# Altium PCB MicrophoneArray.PcbDoc
Units mil, origin at the board's own origin, x right, y up, seen from the top; angles counter-clockwise.
Board outline 2000 x 2000 mil, 2 copper layers (Top Layer, Bottom Layer); 64 components, 44 nets, 289 pads, 89 vias.
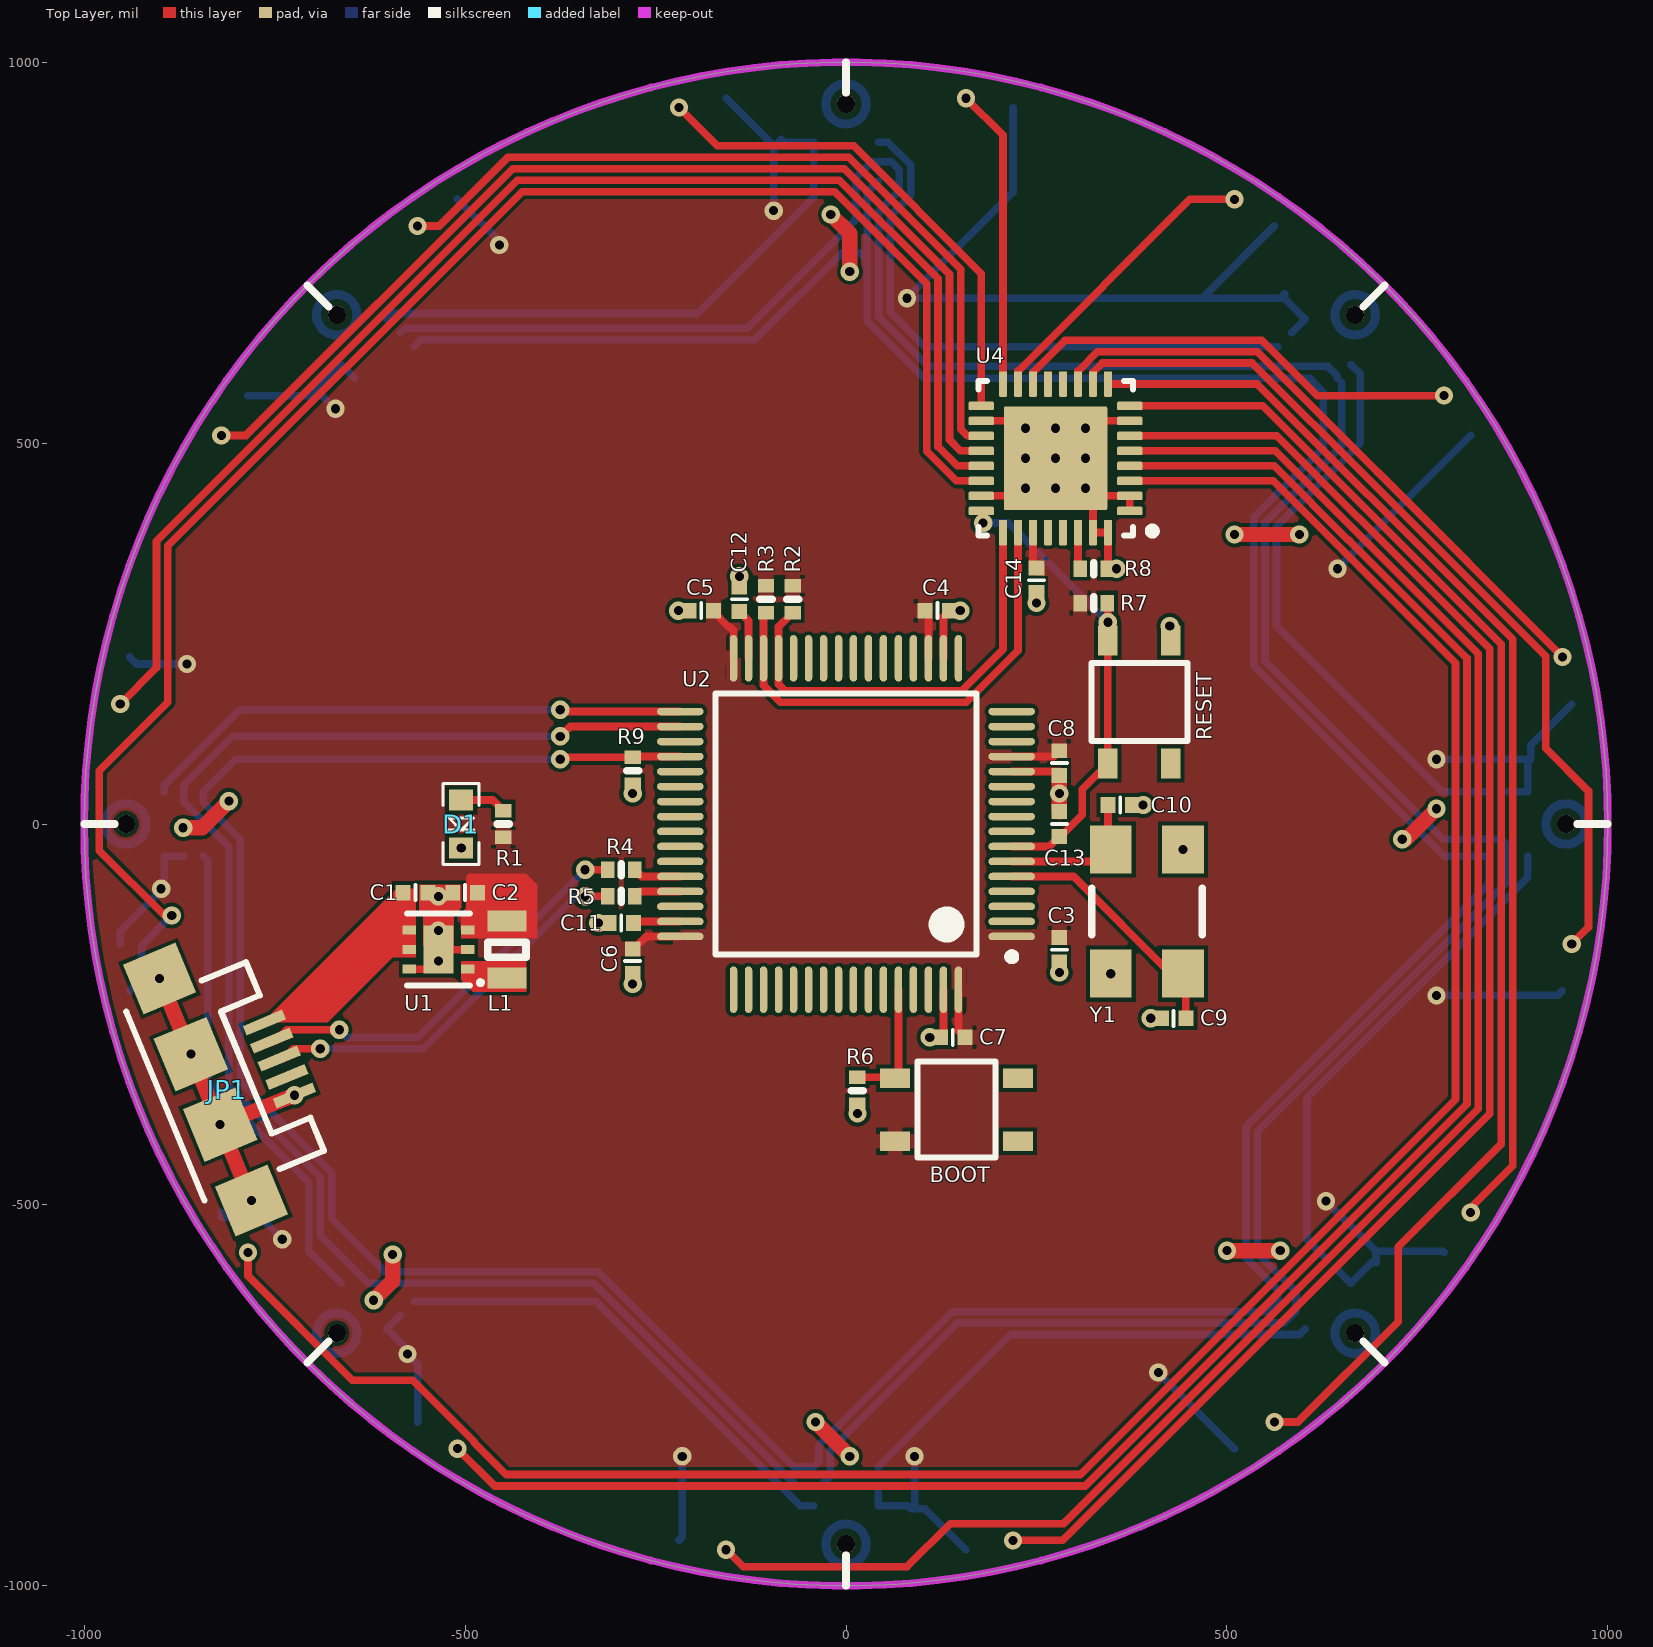
[diagram p0: Top Layer view]
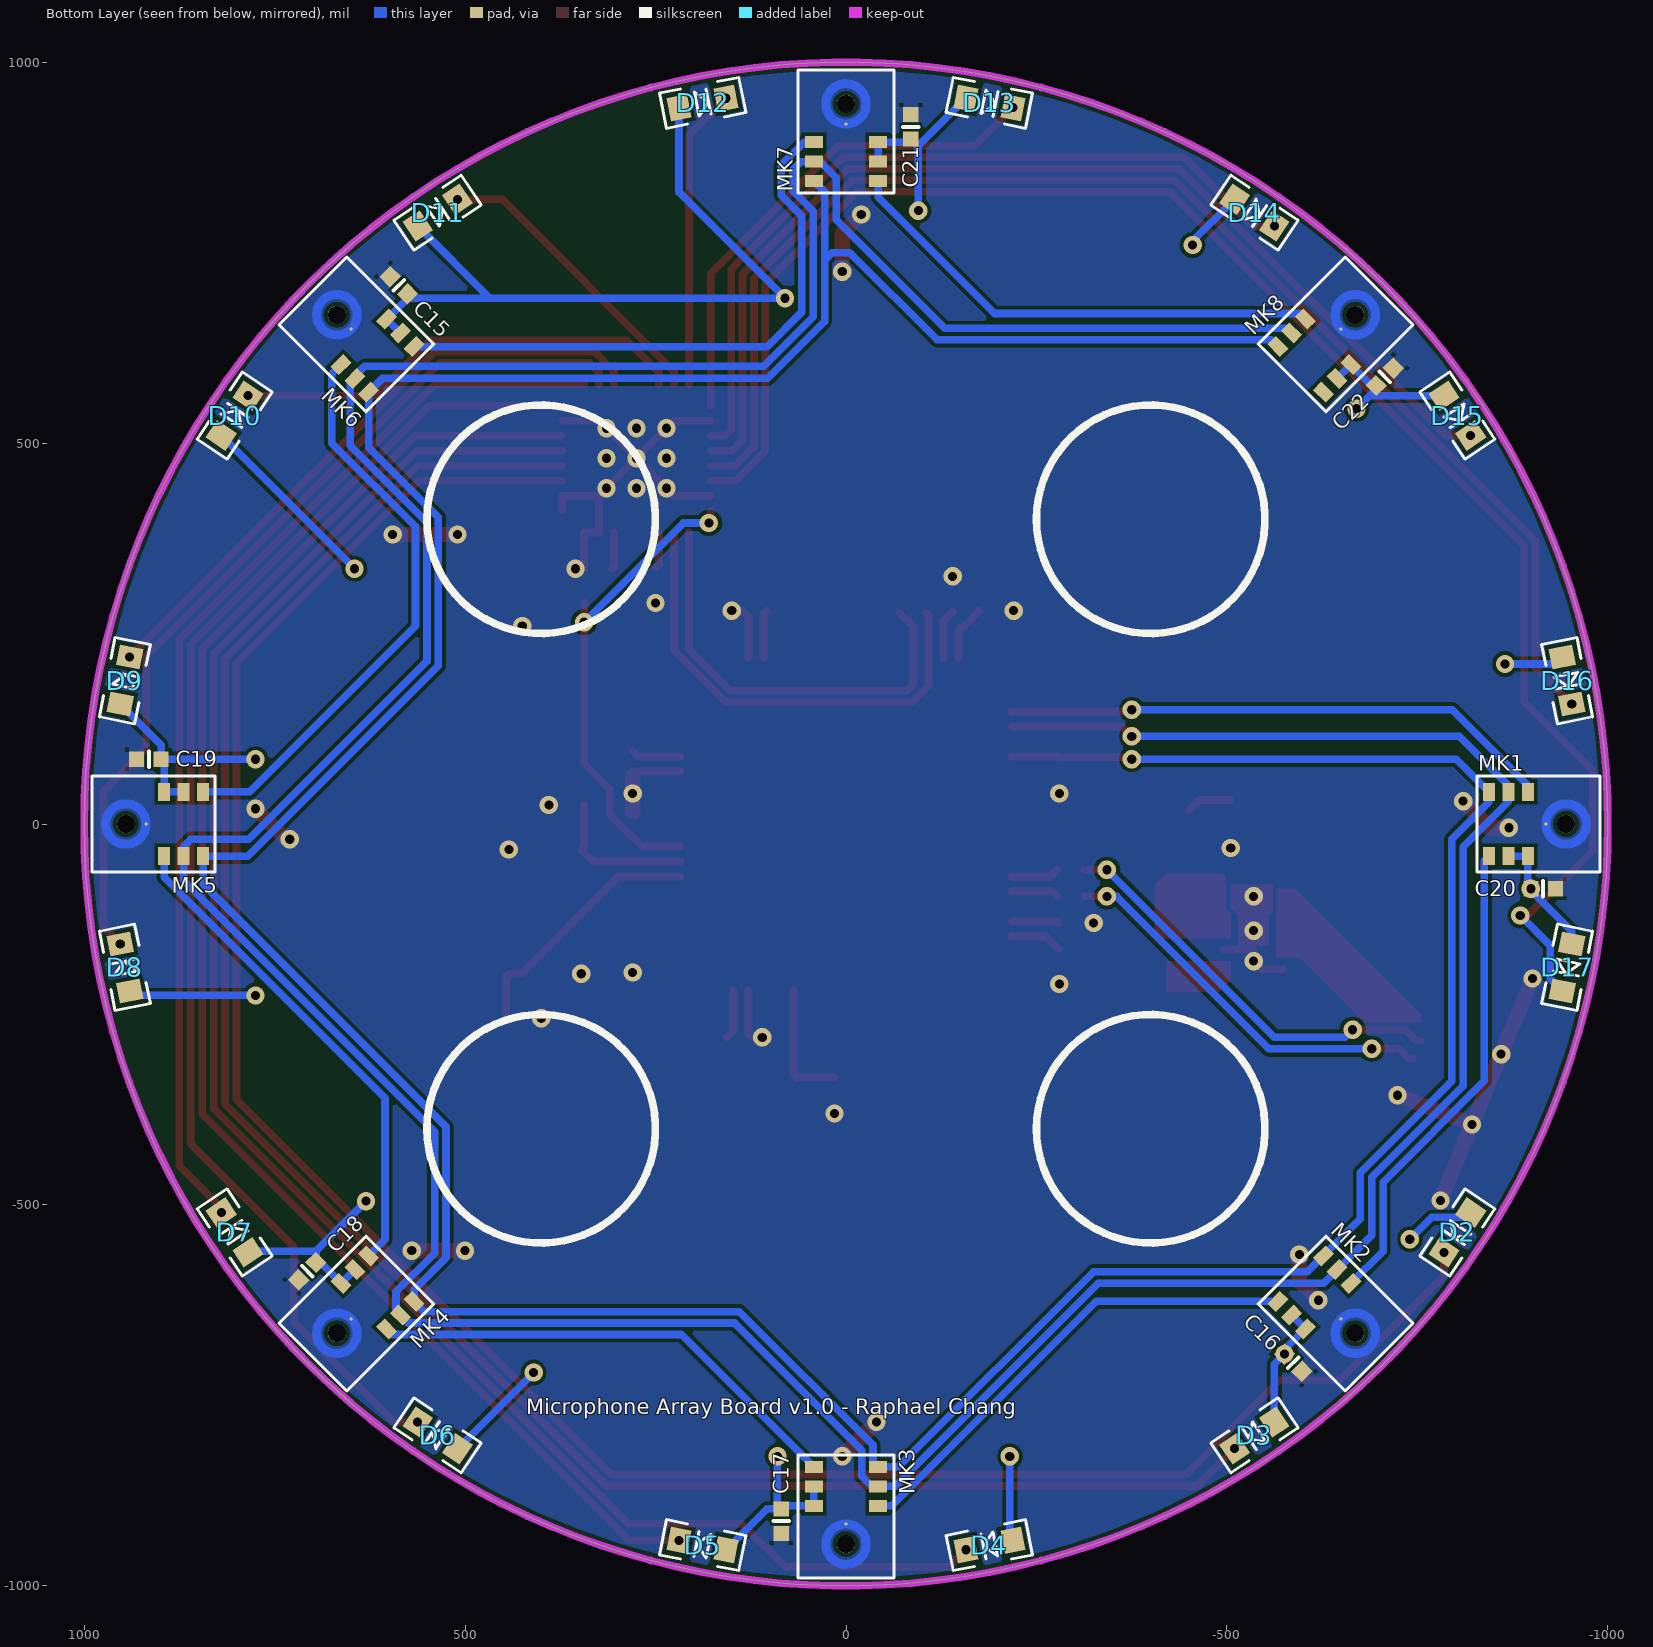
[diagram p1: Bottom Layer view, seen from below]
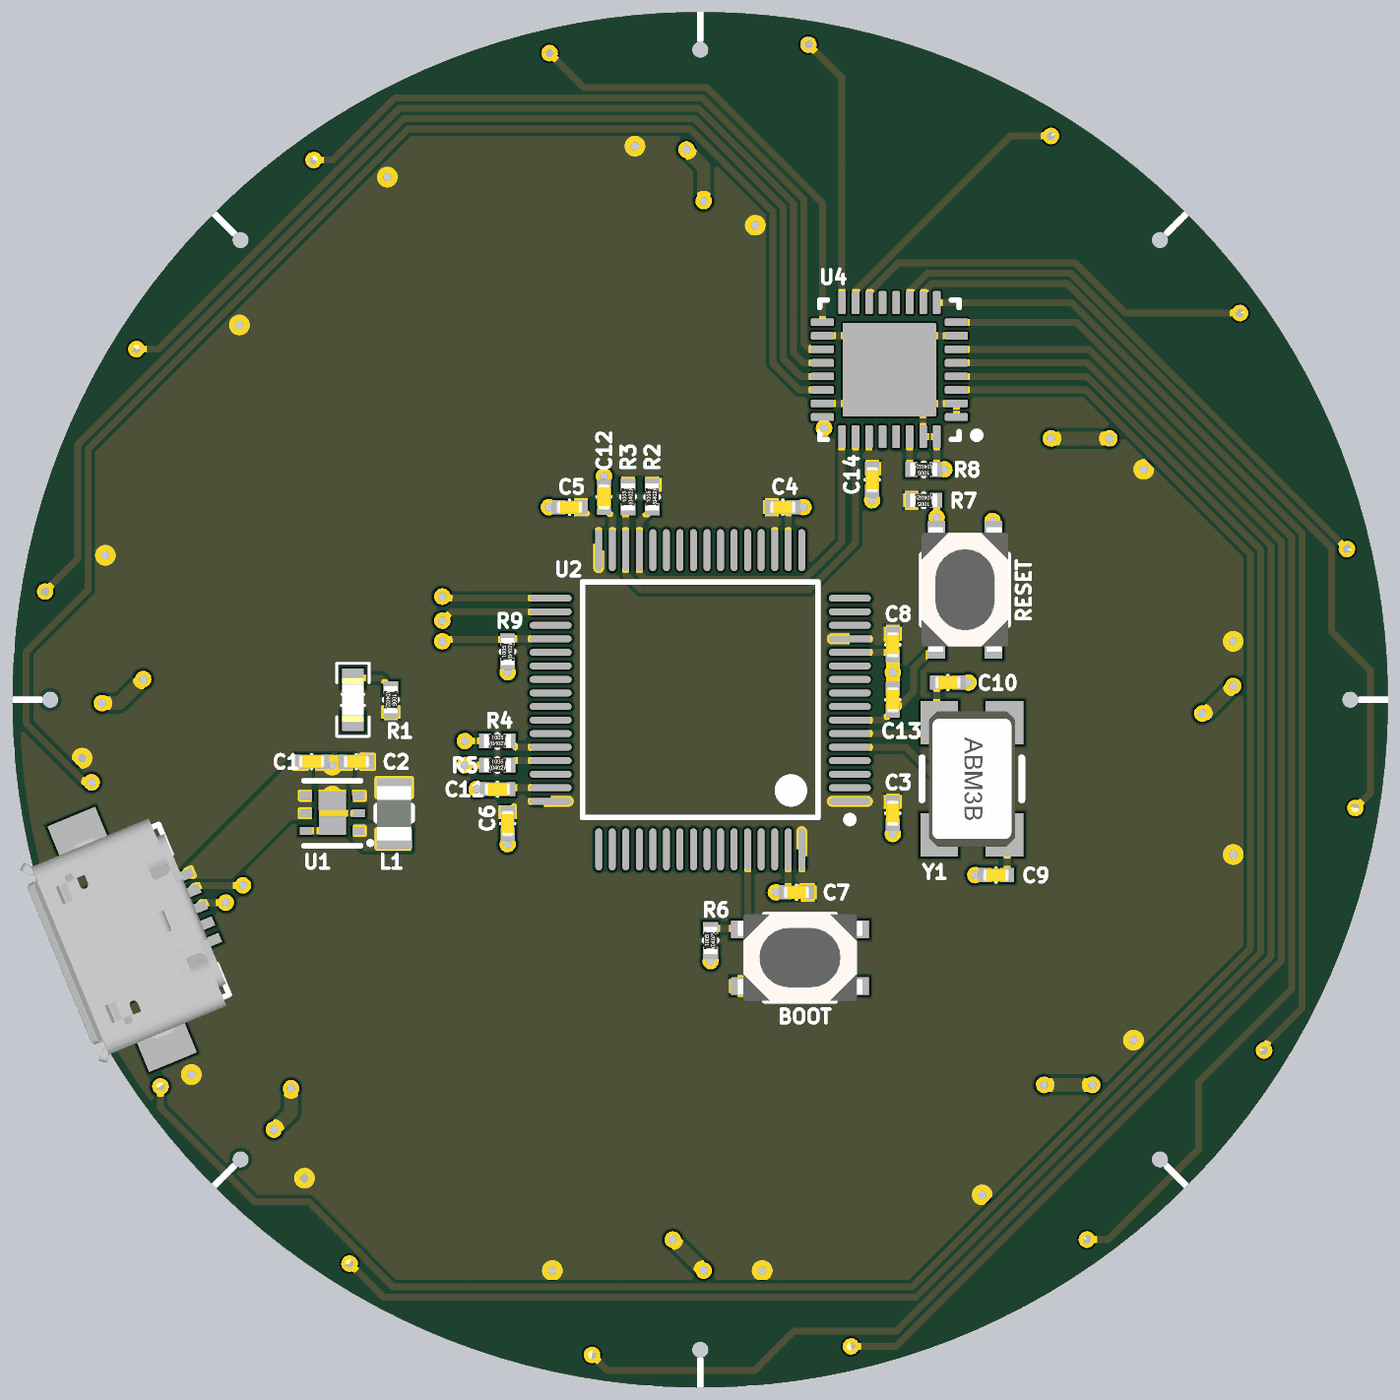
[diagram p2: 3D render of the assembled board from above, using the file's embedded part models]
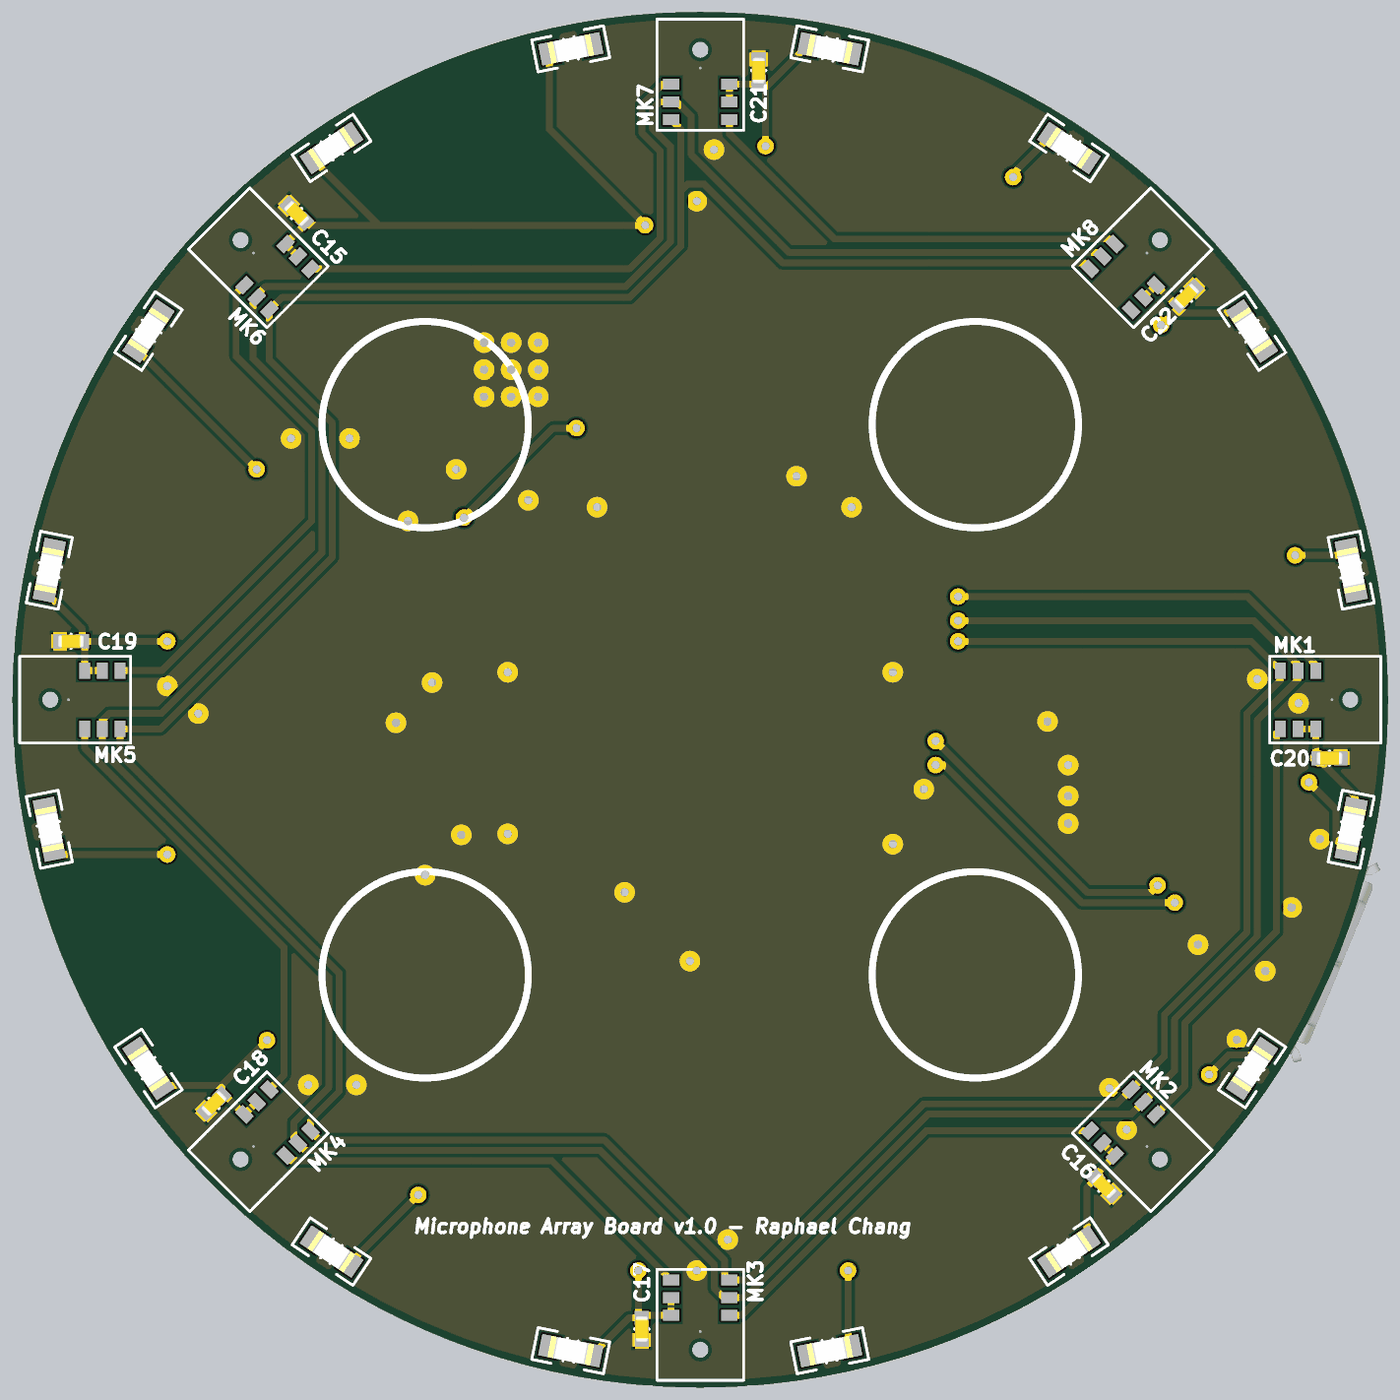
[diagram p3: 3D render of the assembled board from below, using the file's embedded part models]

## Layer stack, top to bottom
Top Solder: solder mask 0.4, Solder Resist, Dk 3.5
Top Layer: signal copper 1.4
Dielectric 1: dielectric 12.6, FR-4, Dk 4.8
Bottom Layer: signal copper 1.4
Bottom Solder: solder mask 0.4, Solder Resist, Dk 3.5

## Board outline
-1000,0 ccw(c0,0) 0,-1000 ccw(c0,0) 1000,0 ccw(c0,0) 0,1000 ccw(c0,0)

## Design rules (kind name [scope] priority, off if disabled: settings)
Clearance [All] p1: gap=5
PolygonConnect PolygonConnect_Via [IsVia] p1: connectstyle=Direct reliefconductorwidth=10 reliefentries=4 polygonreliefangle="90 Angle" airgapwidth=10
PolygonConnect [All] p2: connectstyle=Relief reliefconductorwidth=20 reliefentries=4 polygonreliefangle="90 Angle" airgapwidth=5
RoutingVias [All] p1: holewidth=12 width=24 viastyle="Through Hole" minholewidth=12 minwidth=24 maxholewidth=12 maxwidth=24
SolderMaskExpansion SolderMaskExpansion_Via [IsVia] p1: expansion=1 soldermaskfromhole=TRUE
SolderMaskExpansion [All] p2: expansion=3 soldermaskfromhole=TRUE
Width [All] p1: maxlimit=20 minlimit=8 preferedwidth=10
30 further rules are at their usual default settings.

## Components (designator, comment, footprint, x,y, rotation, side; value= is the part's Value field where it differs from the comment)
BOOT "" SWITCH 145,-375 r0 top (schematic designator BOOT1)
C1 "10uF 6.3V 0402" C0402[1005X55] -565,-90 r180 top
C2 "10uF 6.3V 0402" C0402[1005X55] -500,-90 r0 top
C3 "2.2uF 6.3V 0402" C0402[1005X55] 280,-165 r90 top
C4 "2.2uF 6.3V 0402" C0402[1005X55] 120,280 r180 top
C5 "2.2uF 6.3V 0402" C0402[1005X55] -190,280 r0 top
C6 "2.2uF 6.3V 0402" C0402[1005X55] -280,-180 r90 top
C7 "2.2uF 6.3V 0402" C0402[1005X55] 140,-280 r0 top
C8 "4.7uF 6.3V 0402" C0402[1005X55] 280,80 r90 top
C9 "15pF 50V 0402" C0402[1005X55] 430,-255 r180 top
C10 "15pF 50V 0402" C0402[1005X55] 360,25 r0 top
C11 "2.2uF 6.3V 0402" C0402[1005X55] -295,-130 r0 top
C12 "2.2uF 6.3V 0402" C0402[1005X55] -140,295 r270 top
C13 "0.1uF 6.3V 0402" C0402[1005X55] 280,0 r270 top
C14 "0.1uF 6.3V 0402" C0402[1005X55] 250,320 r90 top
C15 "0.1uF 6.3V 0402" C0402[1005X55] 586.9,707.11 r45 bottom
C16 "0.1uF 6.3V 0402" C0402[1005X55] -586.9,-707.11 r225 bottom
C17 "0.1uF 6.3V 0402" C0402[1005X55] 85,-915 r270 bottom
C18 "0.1uF 6.3V 0402" C0402[1005X55] 707.11,-586.9 r315 bottom
C19 "0.1uF 6.3V 0402" C0402[1005X55] 915,85 r0 bottom
C20 "0.1uF 6.3V 0402" C0402[1005X55] -915,-85 r180 bottom
C21 "0.1uF 6.3V 0402" C0402[1005X55] -85,915 r90 bottom
C22 "0.1uF 6.3V 0402" C0402[1005X55] -707.11,586.9 r135 bottom
D1 "LED_0603_GREEN_5mA" LED0603 -505,0 r270 top
D2 "LED_0603_BLUE_5mA" LED0603 -802.37,-536.13 r303.75 bottom
D3 "LED_0603_BLUE_5mA" LED0603 -536.13,-802.37 r326.25 bottom
D4 "LED_0603_BLUE_5mA" LED0603 -188.26,-946.46 r348.75 bottom
D5 "LED_0603_BLUE_5mA" LED0603 188.26,-946.46 r11.25 bottom
D6 "LED_0603_BLUE_5mA" LED0603 536.13,-802.37 r33.75 bottom
D7 "LED_0603_BLUE_5mA" LED0603 802.37,-536.13 r56.25 bottom
D8 "LED_0603_BLUE_5mA" LED0603 946.46,-188.26 r78.75 bottom
D9 "LED_0603_BLUE_5mA" LED0603 946.46,188.26 r101.25 bottom
D10 "LED_0603_BLUE_5mA" LED0603 802.37,536.13 r123.75 bottom
D11 "LED_0603_BLUE_5mA" LED0603 536.13,802.37 r146.25 bottom
D12 "LED_0603_BLUE_5mA" LED0603 188.26,946.46 r168.75 bottom
D13 "LED_0603_BLUE_5mA" LED0603 -188.26,946.46 r191.25 bottom
D14 "LED_0603_BLUE_5mA" LED0603 -536.13,802.37 r213.75 bottom
D15 "LED_0603_BLUE_5mA" LED0603 -802.37,536.13 r236.25 bottom
D16 "LED_0603_BLUE_5mA" LED0603 -946.46,188.26 r258.75 bottom
D17 "LED_0603_BLUE_5mA" LED0603 -946.46,-188.26 r281.25 bottom
JP1 "USB" USB-MICROB -840.73,-348.24 r292.5 top
L1 "2.2uH" IND0805 -445,-165 r90 top
MK1 "ICS-52000" MIC -895,0 r180 bottom
MK2 "ICS-52000" MIC -632.86,-632.86 r225 bottom
MK3 "ICS-52000" MIC 0,-895 r270 bottom
MK4 "ICS-52000" MIC 632.86,-632.86 r315 bottom
MK5 "ICS-52000" MIC 895,0 r0 bottom
MK6 "ICS-52000" MIC 632.86,632.86 r45 bottom
MK7 "ICS-52000" MIC 0,895 r90 bottom
MK8 "ICS-52000" MIC -632.86,632.86 r135 bottom
R1 "150R 1% 0402" R0402[1005] -450,0 r270 top
R2 "2K2 1% 0402" R0402[1005] -70,295 r90 top
R3 "2K2 1% 0402" R0402[1005] -105,295 r90 top
R4 "22R 1% 0402" R0402[1005] -295,-60 r0 top
R5 "22R 1% 0402" R0402[1005] -295,-95 r0 top
R6 "10K 1% 0402" R0402[1005] 15,-350 r90 top
R7 "10K 1% 0402" R0402[1005] 325,290 r180 top
R8 "1K5 1% 0402" R0402[1005] 325,335 r180 top
R9 "100K 1% 0402" R0402[1005] -280,70 r90 top
RESET "" SWITCH 385,160 r90 top (schematic designator RESET1)
U1 "TPS62291DRVR" WSON-6 -535,-165 r180 top
U2 "STM32F405RGT6" STM-LQFP64_L 0,0 r180 top
U4 "TLC59116IRHBR" RHB0032E_V 275,480 r180 top
Y1 "" ABRA-ABM3B-4_V 395,-115 r270 top

## Footprints (in the part's own frame and the unit in brackets; to place one, negate y for a bottom-side part, rotate by r counter-clockwise, add the part's x,y. Pads: shape width x height; smd on the part's side, far side on the other; paste and mask are expansions set on the pad)
ABRA-ABM3B-4_V [mil] "SMT Crystal, 4-Leads, Body 5.2x3.4mm"
  rect 63x55 smd: 1(-81.5,-47.5) 2(-81.5,47.5) 2(81.5,-47.5) 3(81.5,47.5)
  silkscreen extent -31,-72 31,72, body extent -98,-62 98,63, height 43
C0402[1005X55] [mm] "Chip Capacitor, Body 1.0x0.5mm"
  rect 0.5x0.52 smd: 1(-0.41,0) 2(0.41,0)
  silkscreen extent 0,-0.25 0,0.25, body extent -0.5,-0.25 0.5,0.25, height 0.56
IND0805 [mm] "Chip Inductor Body 2.0x1.25mm"
  rect 0.7x1.3 smd: 1(-0.95,0) 2(0.95,0)
  silkscreen extent -0.25,-0.64 0.25,0.64, body extent -1,-0.63 1,0.63, height 0.85
LED0603 [mm]
  rect 0.7x0.8 smd: A(-0.8,0) C(0.8,0)
  silkscreen extent -1.35,-0.6 1.35,0.6, body extent -0.8,-0.4 0.8,0.4, height 0.75
MIC [mm]
  rect 0.4x0.6 smd: 1(-1.3,-1.075) 2(-0.65,-1.075) 3(0,-1.075) 5(0,1.075) 6(-0.65,1.075) 7(-1.3,1.075)
  round 0.1 smd mask+0: 4(0.6,0)
  round 0.6 hole 0.6 unplated mask+0: 4(1.275,0)
  Top Layer circle w0.3: c1.275,0 r0.675
  silkscreen extent -1.7,-1.6 2.4,1.6, body extent -1.63,-1.5 2.37,1.5, height 1
R0402[1005] [mm] "Chip Resistor, Body 1.0x0.5mm"
  rect 0.45x0.55 smd: 1(-0.45,0) 2(0.45,0)
  silkscreen extent 0,-0.2 0,0.2, body extent -0.5,-0.25 0.5,0.25, height 0.35
RHB0032E_V [mm] "QFN, 32-Leads, Body 5x5mm, Pitch 0.5mm, Thermal Pad 3.45x3.45mm"
  rrect36% 0.85x0.28 smd: 1(-2.475,1.75) 2(-2.475,1.25) 3(-2.475,0.75) 4(-2.475,0.25) 5(-2.475,-0.25) 6(-2.475,-0.75) 7(-2.475,-1.25) 8(-2.475,-1.75) 17(2.475,-1.75) 18(2.475,-1.25) 19(2.475,-0.75) 20(2.475,-0.25) 21(2.475,0.25) 22(2.475,0.75) 23(2.475,1.25) 24(2.475,1.75)
  rrect36% 0.28x0.85 smd: 9(-1.75,-2.475) 10(-1.25,-2.475) 11(-0.75,-2.475) 12(-0.25,-2.475) 13(0.25,-2.475) 14(0.75,-2.475) 15(1.25,-2.475) 16(1.75,-2.475) 25(1.75,2.475) 26(1.25,2.475) 27(0.75,2.475) 28(0.25,2.475) 29(-0.25,2.475) 30(-0.75,2.475) 31(-1.25,2.475) 32(-1.75,2.475)
  rrect3% 3.45x3.45 smd: 33(0,0)
  silkscreen extent -3.35,-2.58 2.58,2.57, body extent -2.5,-2.5 2.5,2.5, height 1
STM-LQFP64_L [mm] "Thin QFP, 64-Leads, Body 10x10mm, Pitch 0.5mm, IPC High Density"
  oval 1.55x0.25 smd: 1(-5.525,3.75) 2(-5.525,3.25) 3(-5.525,2.75) 4(-5.525,2.25) 5(-5.525,1.75) 6(-5.525,1.25) 7(-5.525,0.75) 8(-5.525,0.25) 9(-5.525,-0.25) 10(-5.525,-0.75) 11(-5.525,-1.25) 12(-5.525,-1.75) 13(-5.525,-2.25) 14(-5.525,-2.75) 15(-5.525,-3.25) 16(-5.525,-3.75) 33(5.525,-3.75) 34(5.525,-3.25) 35(5.525,-2.75) 36(5.525,-2.25) 37(5.525,-1.75) 38(5.525,-1.25) 39(5.525,-0.75) 40(5.525,-0.25) 41(5.525,0.25) 42(5.525,0.75) 43(5.525,1.25) 44(5.525,1.75) 45(5.525,2.25) 46(5.525,2.75) 47(5.525,3.25) 48(5.525,3.75)
  oval 0.25x1.55 smd: 17(-3.75,-5.525) 18(-3.25,-5.525) 19(-2.75,-5.525) 20(-2.25,-5.525) 21(-1.75,-5.525) 22(-1.25,-5.525) 23(-0.75,-5.525) 24(-0.25,-5.525) 25(0.25,-5.525) 26(0.75,-5.525) 27(1.25,-5.525) 28(1.75,-5.525) 29(2.25,-5.525) 30(2.75,-5.525) 31(3.25,-5.525) 32(3.75,-5.525) 49(3.75,5.525) 50(3.25,5.525) 51(2.75,5.525) 52(2.25,5.525) 53(1.75,5.525) 54(1.25,5.525) 55(0.75,5.525) 56(0.25,5.525) 57(-0.25,5.525) 58(-0.75,5.525) 59(-1.25,5.525) 60(-1.75,5.525) 61(-2.25,5.525) 62(-2.75,5.525) 63(-3.25,5.525) 64(-3.75,5.525)
  silkscreen extent -5.65,-4.35 4.35,4.55, body extent -5,-5 5,5, height 1.6
SWITCH [mm]
  rect 1x0.65 smd: 1(-2.05,1.05) 2(2.05,1.05) 3(-2.05,-1.05) 4(2.05,-1.05)
  silkscreen extent -1.3,-1.6 1.3,1.6, body extent -2.3,-1.6 2.3,1.6, height 2.5
USB-MICROB [mil]
  rect 14x56 smd: D+(0,105) D-(-25.59,105) GND(52,105) ID(26,105) VBUS(-51.18,105)
  rect 71x75 smd: MT1(-157.48,0) MT2(158,0)
  rect 75x75 smd: P$1(-50,0) P$2(50,0)
  silkscreen extent -134,-57 134,113, body extent -157,-98 157,115, height 112
WSON-6 [mm] "SON, 6-Leads, Body 2x2mm, Pitch 0.65mm, Thermal Pad 1.6x1mm, TI Recommended"
  rect 0.45x0.3 smd: 1(-0.975,0.65) 2(-0.975,0) 3(-0.975,-0.65) 4(0.975,-0.65) 5(0.975,0) 6(0.975,0.65)
  rrect14% 1x0.7 on Top Paste: 7(0,0.45) 7(0,-0.45)
  rect 1x1.6 smd paste-0.5: 7(0,0)
  silkscreen extent -1.45,-1.2 1.05,1.2, body extent -1.05,-1.05 1.05,1.05, height 0.81

## Part data
BOOT RESET: library part DIPT-DTSM-6, "Switch, SPNO Push Button SMD"
C1 C2: library part CAP_10uF_6.3V_0402_20%, "10uF 6.3V 20% 0402 (1005 Metric)"
C3 C4 C5 C6 C7 C11 C12: library part CAP_2.2uF_6.3V_0402_20%, "2.2uF 6.3V 20% 0402 (1005 Metric)"
C8: library part CAP_4.7uF_6.3V_0402_20%, "4.7uF 6.3V 20% 0402 (1005 Metric)"
C9 C10: library part CAP_15pF_50V_0402_5%, "15pF 50V 5% 0402 (1005 Metric)"
C13 C14 C15 C16 C17 C18 C19 C20 C21 C22: library part CAP_0.1uF_6.3V_0402_10%, "0.1uF 6.3V 10% 0402 (1005 Metric)"
JP1: library part USB_MICROB_SMT
L1: library part IND_2.2uH_1.7A_0805_20%, "2.2uH 20% 1.7A 0805"
MK1 MK2 MK3 MK4 MK5 MK6 MK7 MK8: "MIC MEMS DIGITAL OMNI -26DB"
R1: library part RES_150R_0402_1%, "150R 0.063W 1% 0402 (1005 Metric)"
R2 R3: library part RES_2K2_0402_1%, "2K2 0.063W 1% 0402 (1005 Metric)"
R4 R5: library part RES_22R_0402_1%, "22R 0.063W 1% 0402 (1005 Metric)"
R6 R7: library part RES_10K_0402_1%, "10K 0.063W 1% 0402 (1005 Metric)"
R8: library part RES_1K5_0402_1%, "1K5 0.063W 1% 0402 (1005 Metric)"
R9: library part RES_100K_0402_1%, "100K 0.063W 1% 0402 (1005 Metric)"
U1: "Voltage Regulators - Switching Regulators 2.25MHz 1A Step-Down Cnvrtr 3.3V Output"
U2: library part CMP-0243-00089-2, "ARM Cortex-M4 32-bit MCU+FPU, 210 DMIPS, 1024 kB Flash, 192 kB Internal RAM, 51 I/Os, 64-pin LQFP, -40 to 105 degC, Tape and Reel"
U4: library part CMP-0388-00633-2, "16-Bit Fast-Mode Plus (FM+) I2C Bus Constant-Current LED Sink Driver, 3 to 5.5 V, -40 to 85 degC, 32-pin QFN (RHB32), Green (RoHS & no Sb/Br)"
Y1: library part ABRA-ABM3B-4

## Via types
v1: diameter 24, hole 12, Top Layer to Bottom Layer, 89 vias

## Nets (pads, with @x,y where several pads share a name; then routed paths per layer and width w, separated by ;. In a path a pad name is that pad's centre, name@x,y a point inside that pad or via, vN(x,y) a via of type N, cw(c..) or ccw(c..) an arc to the next point about the centre after c; other vN are vias at no path point)
GND: C1.1 C2.1 C3.1 C4.1 C5.1 C6.1 C7.1 C8.1 C9.2 C10.2 C11.1 C12.1 C13.1 C14.1 C15.2 C16.2 C17.2 C18.2 C19.2 C20.2 C21.2 C22.2 D1.C JP1.GND JP1.MT1 JP1.MT2 JP1.P$1 JP1.P$2 MK1.4@-918.62,0 MK2.4@-649.56,-649.56 MK3.4@0,-918.62 MK4.4@649.56,-649.56 MK5.4@918.62,0 MK6.4@649.56,649.56 MK7.4@0,918.62 MK8.4@-649.56,649.56 R6.1 R8.1 R9.1 RESET.4 U1.2 U1.6 U1.7@-535,-165 U2.12 U2.18 U2.63 U4.1 U4.2 U4.7 U4.18 U4.23 U4.31 U4.32 U4.33 Y1.2 | length 1861.4
  Top Layer w10: U1.6 -545.59,-190.59 v1(-535,-180) ; U1.7@-535,-165 U1.2 ; C7.1 127.95,-275.91 U2.63 ; U2.18 127.95,271.81 C4.1 ; U4.23 225.79,430.79 v1(235.63,440.63) v1(275,480) ; U4.18 225.79,529.21 v1(235.63,519.37) v1(275,480) ; U2.12 274.96,68.9 C8.1 ; R8.1 343.9,336.18 U4.32 U4.31 U4.33@324.21,430.79 ; U4.1 U4.2 U4.33@324.21,430.79 ; U4.7 324.21,529.21 v1(314.37,519.37) v1(275,480) ; v1(275,480) v1(314.37,440.63) U4.33@324.21,430.79
  Top Layer w20: v1(-901,-202.75) v1(-859.86,-302.05) v1(-821.6,-394.44) ; v1(-870,-5) -845,-5 v1(-810,30) ; v1(-780.27,-494.21) v1(-821.6,-394.44) ; v1(-723.82,-356.1) v1(-821.6,-394.44) ; v1(-620,-625) -595,-600 v1(-595,-565) ; v1(-40,-785) v1(5,-830) ; v1(-20,800) 5,775 v1(5,725) ; C13.1 v1(280,40) C8.1 ; v1(500,-560) v1(570,-560) ; v1(510,380) v1(595,380) ; v1(730,-20) 735,-20 v1(775,20)
  other v1: 15,-380 110,-280 400,-255 -280,-210 347.5,-196.5 280,-195 -535,-140 -325,-130 -535,-95 442.5,-33.5 -505,-31.5 390,25 -280,40 425,260 -220,280 150,280 250,290 -140,325 355,335 275,440.63 235.63,480 314.37,480 275,519.37
I2C.SCL: R2.1 U2.29 U4.25 | length 575.4
  Top Layer w10: R2.1 -88.58,258.7 U2.29 -88.58,183.58 -80,175 151.81,175 206.1,229.29 U4.25
I2C.SDA: R3.1 U2.30 U4.26 | length 622.6
  Top Layer w10: R3.1 -108.27,274.02 U2.30 -108.27,182.05 -86.21,160 158.02,160 225.79,227.76 U4.26
NetBOOT_1: BOOT.1 R6.2 U2.60 | length 167.9
  Top Layer w10: R6.2 62.91,-332.28 BOOT.1 68.9,-329.05 U2.60
NetC9_1: C9.1 U2.5 Y1.3 | length 337.8
  Top Layer w10: U2.5 298.9,-68.9 426.5,-196.5 Y1.3 446.14,-200.14 C9.1
NetC10_1: C10.1 U2.6 Y1.1 | length 196.5
  Top Layer w10: U2.6 331.79,-49.21 Y1.1 343.86,-29.86 C10.1
NetC11_2: C11.2 U2.47 | length 62.2
  Top Layer w10: C11.2 -276.81,-127.95 U2.47
NetC12_2: C12.2 U2.31 | length 66.3
  Top Layer w10: C12.2 -127.95,266.81 U2.31
NetC13_2: C13.2 R7.1 RESET.1 RESET.2 U2.7 U4.24 | length 636.7
  Top Layer w10: U4.24 177.56,397.44 v1(180,395) ; U2.7 266.61,-29.53 C13.2 281.94,-16.14 310,11.92 310,45.63 RESET.1 RESET.2 v1(343.66,264.88) 343.66,289.06 R7.1
  Bottom Layer w10: v1(180,395) 213.54,395 v1(343.66,264.88)
NetD1_A: D1.A R1.1 | length 60.7
  Top Layer w10: D1.A -463.78,31.5 R1.1
NetD2_C: D2.C U4.3 | length 3027.7
  Top Layer w10: v1(-784.87,-562.31) -784.87,-593.23 -648.1,-730 -568.69,-730 -487.94,-810.75 -487.94,-812.06 -446.15,-853.85 307.51,-853.85 800,-361.36 800,211.18 654.11,357.07 653.9,357.07 560.5,450.47 U4.3
NetD3_C: D3.C U4.4 | length 2685.1
  Top Layer w10: v1(-509.94,-819.87) -460.95,-868.85 313.72,-868.85 815,-367.57 815,217.4 660.33,372.07 660.12,372.07 562.03,470.16 U4.4
NetD4_C: D4.C U4.5 | length 2410.9
  Top Layer w10: v1(-157.37,-952.6) -134.97,-975 80,-975 136.69,-918.31 285.47,-918.31 830,-373.79 830,223.61 666.54,387.07 666.33,387.07 563.56,489.84 U4.5
NetD5_C: D5.C U4.6 | length 2056.2
  Top Layer w10: v1(219.15,-940.31) 284.69,-940.31 845,-380 845,229.82 672.75,402.07 672.54,402.07 565.09,509.53 U4.6
NetD6_C: D6.C U4.8 | length 1779.5
  Top Layer w10: U4.8 546.93,548.9 678.76,417.07 678.97,417.07 860,236.04 860,-420 725,-555 725,-653.1 593.23,-784.87 v1(562.31,-784.87)
NetD7_C: D7.C U4.9 | length 1445
  Top Layer w10: U4.9 539.6,577.44 684.97,432.07 685.18,432.07 875,242.25 875,-448.53 819.87,-503.66 v1(819.87,-509.94)
NetD8_C: D8.C U4.10 | length 1183.9
  Top Layer w10: U4.10 324.21,592.98 336.23,605 533.25,605 691.18,447.07 691.39,447.07 918.31,220.15 918.31,99.47 974.46,43.32 974.46,-135.51 v1(952.6,-157.37)
NetD9_C: D9.C U4.11 | length 829.6
  Top Layer w10: U4.11 304.53,594.53 330,620 539.47,620 697.4,462.07 697.6,462.07 940.31,219.36 v1(940.31,219.15)
NetD10_C: D10.C U4.14 | length 602.4
  Top Layer w10: U4.14 245.47,592.98 287.49,635 545.68,635 618.37,562.31 v1(784.87,562.31)
NetD11_C: D11.C U4.15 | length 394.6
  Top Layer w10: U4.15 225.79,594.51 451.15,819.87 v1(509.94,819.87)
NetD12_C: D12.C U4.16 | length 395.3
  Top Layer w10: v1(157.37,952.6) 206.1,903.87 U4.16
NetD13_C: D13.C U4.17 | length 660.5
  Top Layer w10: v1(-219.15,940.31) -168.84,890 10,890 177.56,722.44 U4.17
NetD14_C: D14.C U4.19 | length 1051.6
  Top Layer w10: v1(-562.31,784.87) -533.77,784.87 -443.64,875 3.79,875 150.83,727.96 150.83,517.92 159.22,509.53 U4.19
NetD15_C: D15.C U4.20 | length 1423.2
  Top Layer w10: v1(-819.87,509.94) -787.49,509.94 -437.43,860 -2.43,860 135.83,721.75 135.83,504.17 150.16,489.84 U4.20
NetD16_C: D16.C U4.21 | length 1796.6
  Top Layer w10: v1(-952.6,157.37) -905,204.97 -905,371.21 -431.21,845 -8.64,845 120.83,715.53 120.83,495.39 146.06,470.16 U4.21
NetD17_C: D17.C U4.22 | length 2235.9
  Top Layer w10: v1(-885,-120) -895,-120 -980,-35 -980,70 -890,160 -890,365 -425,830 -14.85,830 105.83,709.32 105.83,489.17 144.53,450.47 U4.22
  Bottom Layer w10: D17.C -924.47,-203.31 -924.47,-159.47 v1(-885,-120)
NetL1_1: L1.1 U1.1
NetMK1_1: MK1.1 MK2.5 | length 635.6
  Bottom Layer w10: MK1.1 -837.86,-48.28 -837.86,-337.14 -705,-470 -705,-560.72 MK2.5
NetMK2_1: MK2.1 MK3.5 | length 635.6
  Bottom Layer w10: MK2.1 -328.4,-626.6 -60,-895 MK3.5
NetMK3_1: MK3.1 MK4.5 | length 635.6
  Bottom Layer w10: MK3.1 216.14,-670 595.72,-670 MK4.5
NetMK4_1: MK4.1 MK5.5 | length 653.5
  Bottom Layer w10: MK4.1 605,-545.15 605,-360 895,-70 MK5.5
NetMK5_1: MK5.1 MK6.5 | length 762.5
  Bottom Layer w10: MK6.5 675,590.72 675,500 565,390 565,260 782.68,42.32 MK5.1
NetMK6_1: MK6.1 MK7.5 | length 786.8
  Bottom Layer w10: MK7.5 55,895 85,865 85,825 58,798 58,672 103.4,626.6 MK6.1
NetMK7_1: MK7.1 MK8.5 | length 648
  Bottom Layer w10: MK8.5 -595.72,670 -195,670 -42.32,822.68 MK7.1
NetR4_2: R4.2 U2.44 | length 63.4
  Top Layer w10: R4.2 -268.39,-68.9 U2.44
NetR5_2: R5.2 U2.45 | length 62.4
  Top Layer w10: R5.2 -270.87,-88.58 U2.45
NetR8_2: R8.2 U4.30 | length 48.7
  Top Layer w10: U4.30 304.53,337.76 R8.2
TDM.SCK: MK1.6 MK2.6 MK3.6 MK4.6 MK5.6 MK6.6 MK7.6 MK8.6 U2.34 | length 6101.4
  Top Layer w10: v1(-375,115) -362.05,127.95 U2.34
  Bottom Layer w10: MK8.6 -579.01,650.52 -129.48,650.52 13,793 13,848.32 34.09,869.41 MK7.6 59.38,869.41 70,858.79 70,831.21 43,804.21 43,665.79 107.93,600.86 631.95,600.86 644.69,588.12 MK6.6 ; v1(-375,115) -804.97,115 -869.41,50.56 MK1.6 -869.41,29.41 -810,-30 -810,-343.79 -690,-463.79 -690,-539.53 -626.85,-602.68 -331.11,-602.68 -64.38,-869.41 MK3.6 -34.09,-869.41 -20.51,-855.84 -20.51,-821.72 146.21,-655 574.53,-655 590.66,-638.87 590.66,-613.85 540,-563.18 540,-403.79 869.41,-74.38 MK5.6 869.41,-29.41 860,-20 783.89,-20 550,213.89 550,396.21 650.52,496.73 MK6.6@650.52,579.38
TDM.SD: MK1.7 MK2.7 MK3.7 MK4.7 MK5.7 MK6.7 MK7.7 MK8.7 R9.2 U2.36 | length 5775.4
  Top Layer w10: v1(-375,85) -372.28,87.72 R9.2 -279.13,88.58 U2.36
  Bottom Layer w10: MK8.7 -557.82,635.52 -119.48,635.52 -5,750 18,750 28,740 ; v1(-375,85) -801.14,85 MK1.7 -843.82,28.82 -795,-20 -795,-337.57 -675,-457.57 -675,-518.34 -605.66,-587.68 -324.9,-587.68 -68.75,-843.82 MK3.7 -35.51,-837.01 -35.51,-815.51 140,-640 553.34,-640 MK4.7 566.74,-611.14 525,-569.4 525,-397.57 843.82,-78.75 MK5.7 785,-42.32 535,207.67 535,402.43 626.6,494.02 MK6.7 608.34,585 102.57,585 28,659.57 28,729.61 28,740 ; MK7.7 28,829.5 28,740
TDM.WS: MK1.5 U2.33 | length 727.9
  Top Layer w10: v1(-375,150) -372.64,147.64 U2.33
  Bottom Layer w10: MK1.5 -895,50.56 -795.56,150 v1(-375,150)
USB.DM: JP1.D- R4.1 | length 542
  Top Layer w10: JP1.D- -748.51,-284.42 -734.09,-270 v1(-665,-270) ; v1(-342.33,-60) R4.1
  Bottom Layer w10: v1(-665,-270) -655,-280 -562.33,-280 v1(-342.33,-60)
USB.DP: JP1.D+ R5.1 | length 519.3
  Top Layer w10: JP1.D+ -738.72,-308.06 -725.66,-295 v1(-690,-295) ; v1(-342.33,-95) R5.1
  Bottom Layer w10: v1(-690,-295) -555,-295 -355,-95 v1(-342.33,-95)
VCC: BOOT.3 C2.2 C3.2 C4.2 C5.2 C6.2 C7.2 C8.2 C14.2 C15.1 C16.1 C17.1 C18.1 C19.1 C20.1 C21.1 C22.1 D2.A D3.A D4.A D5.A D6.A D7.A D8.A D9.A D10.A D11.A D12.A D13.A D14.A D15.A D16.A D17.A L1.2 MK1.2 MK1.3 MK2.2 MK2.3 MK3.2 MK3.3 MK4.2 MK4.3 MK5.2 MK5.3 MK6.2 MK6.3 MK7.2 MK7.3 MK8.2 MK8.3 R1.2 R2.2 R3.2 R7.2 U1.3 U2.1 U2.13 U2.19 U2.32 U2.48 U2.64 U4.27 | length 3918.9
  Top Layer w10: C6.2 -278.5,-163.86 -262.28,-147.64 U2.48 ; C5.2 -173.86,278.5 -154.38,259.02 -152.87,259.02 -147.64,253.78 U2.32 ; C4.2 108.27,275.59 U2.19 ; U2.64 147.64,-271.5 C7.2 ; U2.13 272.44,88.58 C8.2 ; U4.27 245.47,340.67 C14.2
  Bottom Layer w10: D17.A -952.6,-140.68 -898.86,-86.94 v1(-898.86,-85) -895,-81.14 MK1.3 MK1.2 ; D16.A -931.16,210 v1(-865,210) ; D2.A -819.87,-516.21 -768.79,-516.21 v1(-740,-545) ; D15.A -687.31,562.31 ; v1(-670,545) -687.31,562.31 ; MK8.2 MK8.3 -690.24,575.48 C22.1 -695.69,570.69 -687.31,562.31 ; MK2.2 MK2.3 -575.48,-690.24 v1(-575.48,-695.69) -562.31,-708.86 D3.A ; D14.A -450.07,760 v1(-455,760) ; D4.A -215,-936.16 v1(-215,-830) ; D13.A -95,890.23 -95,888.86 ; v1(-95,805) -95,888.86 ; MK7.2 MK7.3 -81.14,895 C21.1 -95,888.86 ; MK3.2 MK3.3 81.14,-895 C17.1 ; v1(90,-830) 90,-893.86 C17.1 ; D5.A 103.63,-898.86 C17.1 ; D12.A 219.15,829.15 v1(80,690) 467.44,690 ; v1(410,-720) D6.A D6.A ; D11.A 467.44,690 ; MK6.2 MK6.3 575.48,690.24 C15.1 569.79,690 467.44,690 ; v1(630,-495) 695.69,-560.69 ; MK4.2 MK4.3 690.24,-575.48 C18.1 695.69,-560.69 ; v1(645,335.07) D10.A ; v1(775,-225) 934.47,-225 D8.A ; v1(775,85) C19.1 ; D7.A 783.25,-560.69 695.69,-560.69 ; MK5.2 MK5.3 895,81.14 C19.1 ; D9.A@952.75,157.38 898.86,103.49 C19.1
VUSB: C1.2 JP1.VBUS U1.4 U1.5
pads on no net: BOOT.2 BOOT.4 JP1.ID MK1.4@-945.2,0 MK2.4@-668.36,-668.36 MK3.4@0,-945.2 MK4.4@668.36,-668.36 MK5.4@945.2,0 MK6.4@668.36,668.36 MK7.4@0,945.2 MK8.1 MK8.4@-668.36,668.36 RESET.3 U1.7@-535,-147.28 U1.7@-535,-182.72 U2.2 U2.3 U2.4 U2.8 U2.9 U2.10 U2.11 U2.14 U2.15 U2.16 U2.17 U2.20 U2.21 U2.22 U2.23 U2.24 U2.25 U2.26 U2.27 U2.28 U2.35 U2.37 U2.38 U2.39 U2.40 U2.41 U2.42 U2.43 U2.46 U2.49 U2.50 U2.51 U2.52 U2.53 U2.54 U2.55 U2.56 U2.57 U2.58 U2.59 U2.61 U2.62 U4.12 U4.13 U4.28 U4.29

## Polygon pours and split planes (outlines as drawn)
GND on Bottom Layer "GND_L02_P000" (solid, remove dead copper, pour order 0): -1000,-1000 1000,-1000 1000,1000 -1000,1000
VCC on Top Layer "VCC_L01_P002" (solid, remove dead copper, pour order 2): 1000,-1000 -1000,-1000 -1000,1000 1000,1000

## Keep-outs
Keep-Out Layer:
  circle w10: c0,0 r1000

## Other copper
Top Layer:
  region net VUSB: -755,-260 -680,-260 -595,-175 -565,-175 -565,-85 -590,-85 -755,-250
  region net GND: -555,-160 -515,-160 -515,-120 -505,-110 -505,-80 -560,-80 -560,-115 -555,-120
  region net VCC: -505,-150 -405,-150 -405,-80 -420,-65 -495,-65 -498.7,-68.7 -498.7,-111.35 -504.94,-117.6
  region net NetL1_1: -420,-220 -420,-180 -505,-180 -505,-205 -490,-220

## Silkscreen, mask and mechanical layers (free items; w line width, h text height)
Top Overlay:
  lines w10: -1000,0 -960,0 ; -707.11,-707.11 -678.82,-678.82 ; -707.11,707.11 -678.82,678.82 ; 0,-1000 0,-960 ; 0,960 0,1000 ; 678.82,-678.82 707.11,-707.11 ; 678.82,678.82 707.11,707.11 ; 960,0 1000,0
Bottom Overlay:
  circle w10: c-400,400 r150
  circle w10: c400,400 r150
  circle w10: c400,-400 r150
  circle w10: c-400,-400 r150
  text "Microphone Array Board v1.0 - Raphael Chang" at 420,-775 h20